# EAGLE board untitled (EAGLE 9.6.2)
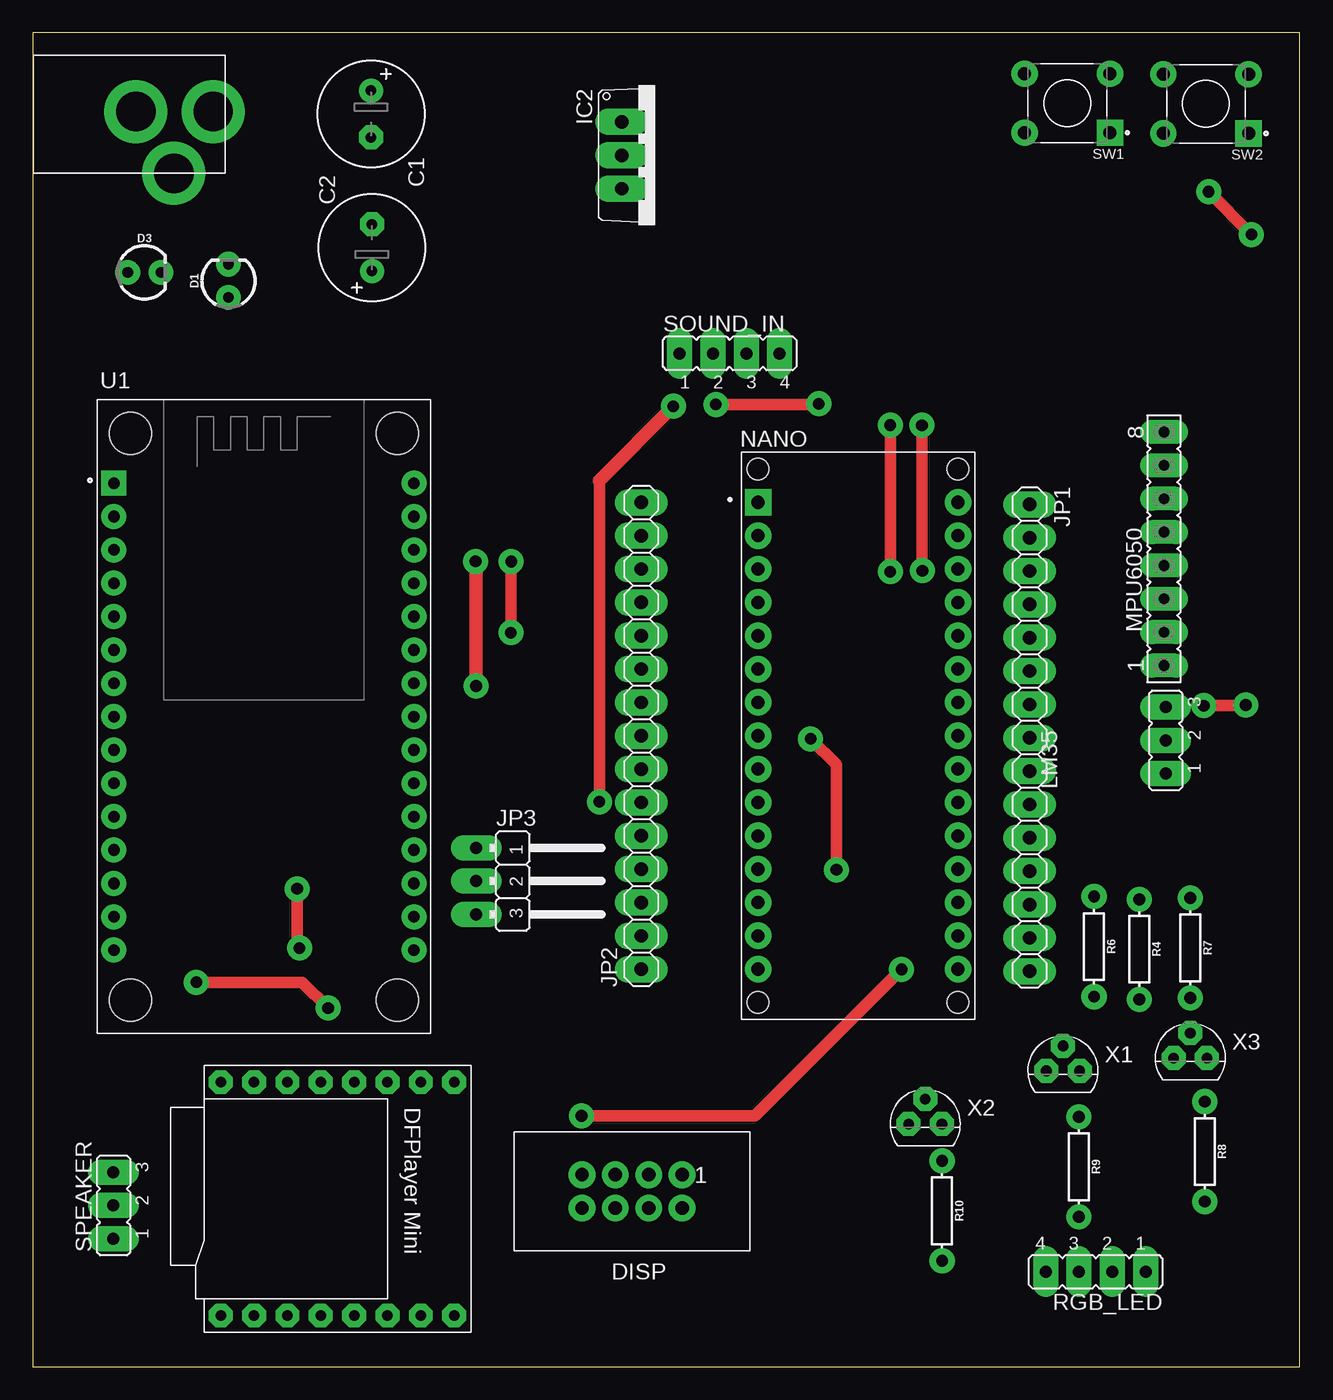
[diagram p0: board, top side]
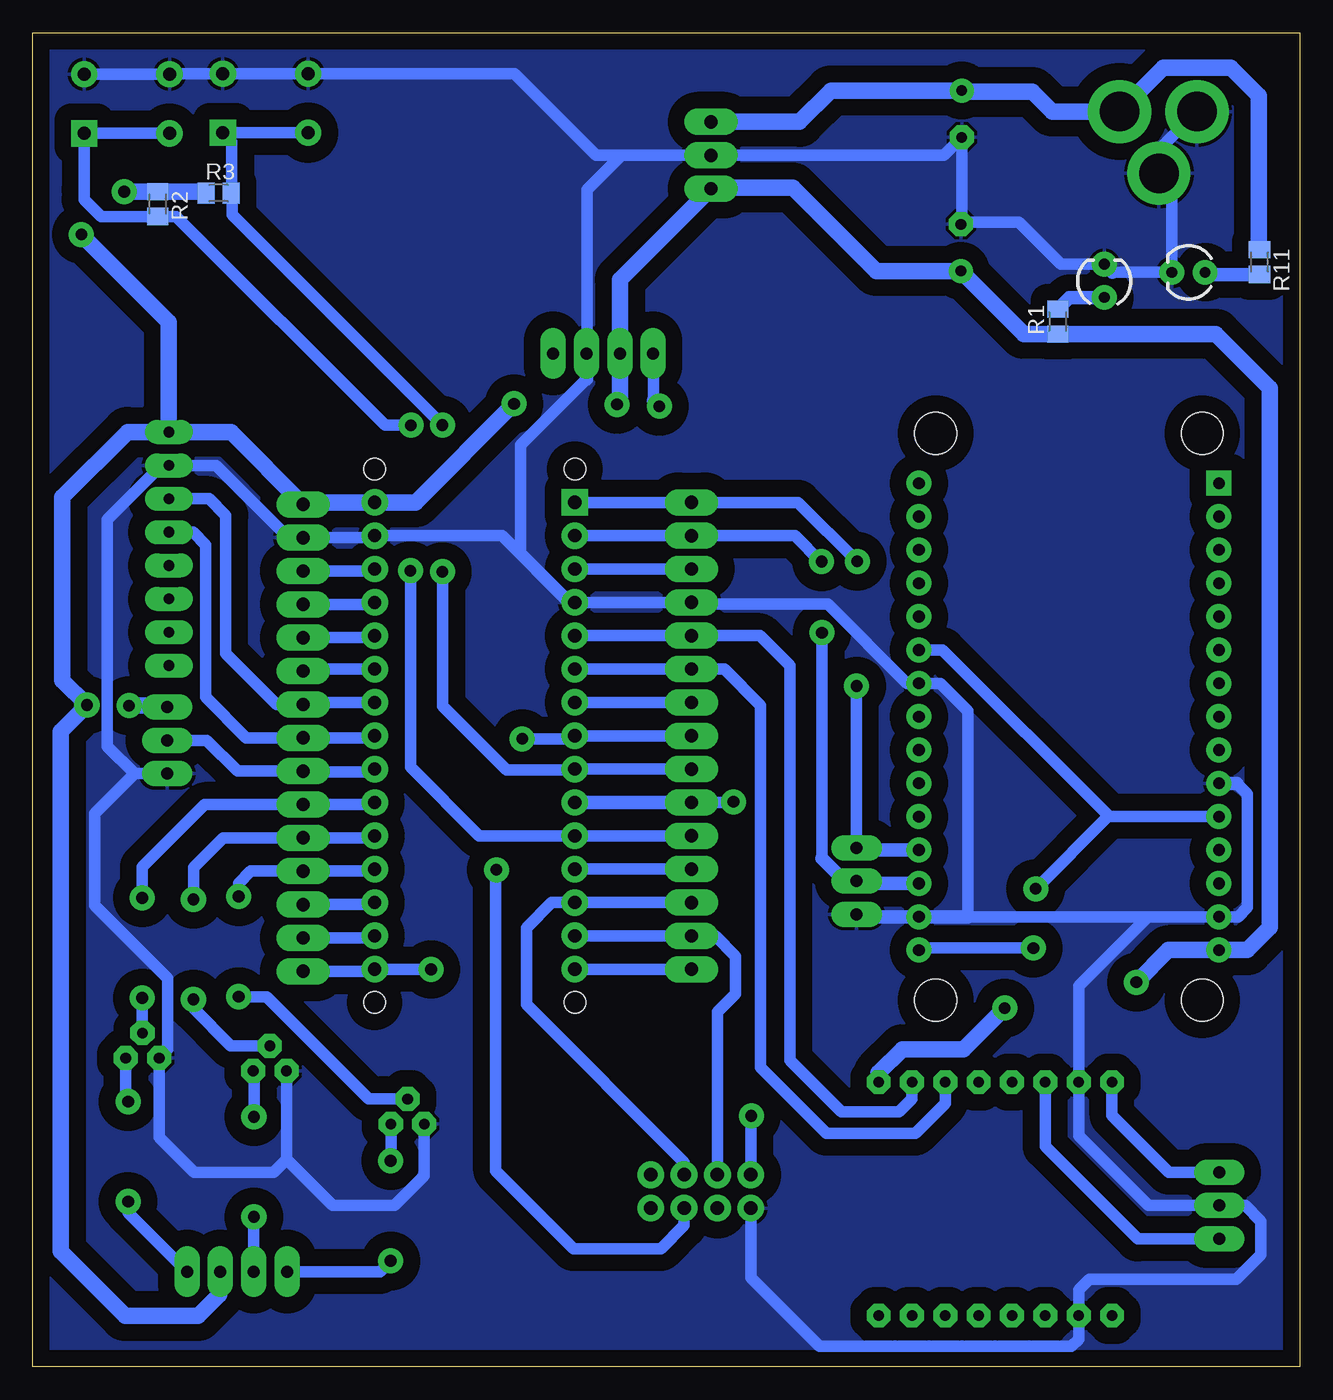
[diagram p1: board, bottom side, seen from below]

Size 96.52 x 101.6 mm. Coordinates in mm from the lower left corner, seen from the top.
Outline: 0,0 96.52,0 96.52,101.6 0,101.6 0,0
Copper layers (1*16): Top 0.035mm / dielectric 1.5mm / Bottom 0.035mm
Design rules "default *": minimum track width 6mil, minimum drill 0.35mm, track to track 6mil, track to pad 6mil, pad to pad 6mil, via to via 6mil, smd to smd 6mil, copper to edge 40mil, drill to drill 6mil, minimum pad ring 20mil, minimum via ring 20mil, stop-mask expansion 4mil, vias tented up to drill 0mil, thermal gap 10mil

## Footprints (pad centres in the part's own frame; a part is rotated, then mirrored left to right if it is on the bottom)
E3,5-8 = drill 0.813 pad 1.6: + -1.778,0 | drill 0.813 pad 1.6 octagon: - 1.778,0
LED_3MM = drill 0.813 pad 1.88: A -1.27,0; K 1.27,0
612008235121 = drill 1.02: 1 -3.81,-1.27; 2 -3.81,1.27; 3 -1.27,-1.27; 4 -1.27,1.27; 5 1.27,-1.27; 6 1.27,1.27; 7 3.81,-1.27; 8 3.81,1.27
TO220V = drill 1.016 long: 1 -2.54,-2.54; 2 0,-2.54; 3 2.54,-2.54
1X15 = drill 1.016 long: 1 -17.78,0; 2 -15.24,0; 3 -12.7,0; 4 -10.16,0; 5 -7.62,0; 6 -5.08,0; 7 -2.54,0; 8 0,0; 9 2.54,0; 10 5.08,0; 11 7.62,0; 12 10.16,0; 13 12.7,0; 14 15.24,0; 15 17.78,0
JP2W = drill 0.914 long: 1 -2.54,-1.27; 2 0,-1.27; 3 2.54,-1.27
JP2 = drill 0.914 long: 1 -2.54,0; 2 0,0; 3 2.54,0
FE08 = drill 0.813 long: 1 -8.89,0; 2 -6.35,0; 3 -3.81,0; 4 -1.27,0; 5 1.27,0; 6 3.81,0; 7 6.35,0; 8 8.89,0
MODULE_A000005 = drill 1 square: 1 -7.62,17.78 | drill 1: 2 -7.62,15.24; 3 -7.62,12.7; 4 -7.62,10.16; 5 -7.62,7.62; 6 -7.62,5.08; 7 -7.62,2.54; 8 -7.62,0; 9 -7.62,-2.54; 10 -7.62,-5.08; 11 -7.62,-7.62; 12 -7.62,-10.16; 13 -7.62,-12.7; 14 -7.62,-15.24; 15 -7.62,-17.78; 16 7.62,-17.78; 17 7.62,-15.24; 18 7.62,-12.7; 19 7.62,-10.16; 20 7.62,-7.62; 21 7.62,-5.08; 22 7.62,-2.54; 23 7.62,0; 24 7.62,2.54; 25 7.62,5.08; 26 7.62,7.62; 27 7.62,10.16; 28 7.62,12.7; 29 7.62,15.24; 30 7.62,17.78 | hole 1.651: -7.62,-20.32; 7.62,-20.32; -7.62,20.32; 7.62,20.32
M0805 = smd 1.3 x 1.6: 1 -0.95,0; 2 0.95,0
AXIAL-0.3 = drill 0.9 pad 1.88: P$1 -3.81,0; P$2 3.81,0
JP4 = drill 0.914 long: 1 -3.81,0; 2 -1.27,0; 3 1.27,0; 4 3.81,0
TE_1825910-2 = drill 0.99 square: 1 0,0 | drill 0.99: 2 6.5,0; 3 0,-4.5; 4 6.5,-4.5
MODULE_ZC563900 = drill 0.889 pad 1.753 square: 1 -11.43,17.78 | drill 0.889 pad 1.753: 2 -11.43,15.24; 3 -11.43,12.7; 4 -11.43,10.16; 5 -11.43,7.62; 6 -11.43,5.08; 7 -11.43,2.54; 8 -11.43,0; 9 -11.43,-2.54; 10 -11.43,-5.08; 11 -11.43,-7.62; 12 -11.43,-10.16; 13 -11.43,-12.7; 14 -11.43,-15.24; 15 -11.43,-17.78; 16 11.43,-17.78; 17 11.43,-15.24; 18 11.43,-12.7; 19 11.43,-10.16; 20 11.43,-7.62; 21 11.43,-5.08; 22 11.43,-2.54; 23 11.43,0; 24 11.43,2.54; 25 11.43,5.08; 26 11.43,7.62; 27 11.43,10.16; 28 11.43,12.7; 29 11.43,15.24; 30 11.43,17.78 | hole 3.2: -10.16,21.59; 10.16,21.59; 10.16,-21.59; -10.16,-21.59
DFPLAYER = drill 0.8 pad 1.676 octagon: ADKEY1 8.89,-1.27; ADKEY2 8.89,1.27; BUSY 8.89,8.89; DAC_L -8.89,-1.27; DAC_R -8.89,1.27; GND_1 -8.89,-6.35; GND_2 8.89,-6.35; IO1 8.89,-8.89; IO2 8.89,-3.81; RX -8.89,6.35; SPK1 -8.89,-3.81; SPK2 -8.89,-8.89; TX -8.89,3.81; USB+ 8.89,3.81; USB- 8.89,6.35; VCC -8.89,8.89
PJ-102A = drill 3 pad 4.8: RING 0.1,-3.39; RING_SW -4.6,-6.29; TIP 0.1,-9.29
TO92 = drill 0.813 octagon: 1 1.27,0; 2 0,1.905; 3 -1.27,0

## Placement (x,y rotation side)
C1  [E3,5-8]  25.76,95.42 270 top
C2  [E3,5-8]  25.83,85.23 90 top
D1  [LED_3MM]  14.91,82.71 90 top
D3  [LED_3MM]  8.49,83.36 0 top
DISP  [612008235121]  45.64,13.35 180 top
IC2  7805TV  [TO220V]  47.4,92.27 270 top
JP1  [1X15]  75.93,47.9 270 top
JP2  [1X15]  46.35,48.06 90 top
JP3  [JP2W]  35.05,36.99 270 top
LM35  [JP2]  86.29,47.71 90 top
MPU6050  [FE08]  86.16,62.3 90 top
NANO  A000005  [MODULE_A000005]  62.86,48.06 0 top
R1  1k  [M0805]  18.46,79.61 90 bottom
R2  1k  [M0805]  87,88.56 270 bottom
R3  1k  [M0805]  82.37,89.4 0 bottom
R4  330  [AXIAL-0.3]  84.28,31.79 270 top
R6  330  [AXIAL-0.3]  80.83,32 270 top
R7  330  [AXIAL-0.3]  88.18,31.9 270 top
R8  330  [AXIAL-0.3]  89.27,16.38 270 top
R9  330  [AXIAL-0.3]  79.68,15.22 270 top
R10  330  [AXIAL-0.3]  69.26,11.87 270 top
R11  1k  [M0805]  3.08,84.15 270 bottom
RGB_LED  [JP4]  80.97,7.24 180 top
SOUND_IN  [JP4]  53.07,77.18 0 top
SPEAKER  [JP2]  6.14,12.28 90 top
SW1  1825910-2  [TE_1825910-2]  82.05,93.99 180 top
SW2  1825910-2  [TE_1825910-2]  92.61,93.94 180 top
U1  ZC563900  [MODULE_ZC563900]  17.6,49.51 0 top
U$1  DFPLAYER  [DFPLAYER]  23.2,12.78 270 top
U$3  2.1MMJACKTHM  [PJ-102A]  4.45,95.5 90 top
X1  [TO92]  78.47,22.54 0 top
X2  [TO92]  67.98,18.48 0 top
X3  [TO92]  88.17,23.5 0 top

## Library data of the parts
C1 C2 JP1 JP2 R1-R3 R11 U$3 = adafruit
D1 D3 = SparkFun-LED; PROD_ID: DIO-08794
DISP = Wurth_Elektronik_Electromechanic_Wire_to_Board_Connectors_rev19a
IC2 = linear
JP3 LM35 RGB_LED SOUND_IN SPEAKER = jumper
MPU6050 = con-lsta; OC_FARNELL: unknown; OC_NEWARK: unknown
NANO = A000005; AVAILABILITY: Good; DESCRIPTION: ATmega328 Arduino Nano AVR® ATmega AVR MCU 8-Bit Embedded Evaluation Board; MF: Arduino; MP: A000005; PACKAGE: None; PRICE: None; PURCHASE-URL: https://pricing.snapeda.com/search/part/A000005/?ref=eda
R4 R6-R10 = SparkFun-Resistors; PROD_ID: RES-8371
SW1 SW2 = 1825910-2; AVAILABILITY: In Stock; COMMENT: 1825910-2; CONFIGURATION_POLE-THROW: Single Pole - Single Throw; CONTACT_CURRENT_RATING: 50 mA; DESCRIPTION: 50 mA SPST Round Actuator 160 Gram Force Tactile Pushbutton Switch; EU_ROHS_COMPLIANCE: Compliant; MF: TE Connectivity; MP: 1825910-2; PACKAGE: None; PRICE: None; PURCHASE-URL: https://pricing.snapeda.com/search/part/1825910-2/?ref=eda
U1 = nodemcuZC563900; AVAILABILITY: Unavailable; DESCRIPTION: NodeMcu Lua ESP8266 WIFI Internet of Things Network Development Module Board; MF: YKS; MP: ZC563900; PACKAGE: None; PRICE: None
U$1 = DFPlayer_v1
X1-X3 = sym

## Nets
3V3: U1.11 U1.16 U1.25
5V: C2.+ IC2.3 JP1.1 LM35.3 MPU6050.8 NANO.30 R1.1 R2.1 R3.1 RGB_LED.2 SOUND_IN.2 U1.15 U$1.VCC
5V0: JP1.4 NANO.27
9_IN: C1.+ IC2.1 R11.1 U$3.TIP
A0: JP1.12 NANO.19 R6.P$1
A1: JP1.11 NANO.20 R4.P$1
A2: JP1.10 NANO.21 R7.P$1
A6: JP1.6 NANO.25
A7: JP1.5 NANO.26
AD0: MPU6050.2
AREF: JP1.13 NANO.18
BACK: JP2.5 NANO.11 R2.2 SW2.1 SW2.2
BASE_BLUE: R6.P$2 X2.2
BASE_GREEN: R4.P$2 X1.2
BASE_RED: R7.P$2 X3.2
BLUE: R10.P$2 RGB_LED.4
COLLECTOR_BLUE: R10.P$1 X2.1
COLLECTOR_GREEN: R9.P$1 X1.1
COLLECTOR_RED: R8.P$1 X3.1
CS_DISP: DISP.3 JP2.3 NANO.13
D4: JP2.9 NANO.7
D9: JP2.4 NANO.12
GND: C1.- C2.- D1.K D3.K DISP.8 IC2.2 JP1.2 JP2.12 JP3.3 LM35.1 MPU6050.7 NANO.4 NANO.29 SOUND_IN.3 SPEAKER.2 SW1.3 SW1.4 SW2.3 SW2.4 U1.10 U1.14 U1.17 U1.24 U$1.GND_1 U$1.GND_2 U$3.RING U$3.RING_SW X1.3 X2.3 X3.3
GREEN: R9.P$2 RGB_LED.3
INT: MPU6050.1
MISO: JP2.1 NANO.15
MOSI: DISP.5 JP2.2 NANO.14
N$1: DISP.2
N$2: D3.A R11.2
N$3: D1.A R1.2
N$5: DISP.6
N$8: JP1.14 NANO.17
N$13: U$1.DAC_R
N$14: U$1.DAC_L
N$18: U$1.BUSY
N$19: U$1.USB-
N$20: U$1.USB+
N$21: U$1.ADKEY2
N$22: U$1.ADKEY1
N$23: U$1.IO2
N$25: U$1.IO1
OK: JP2.7 NANO.9 R3.2 SW1.1 SW1.2
RED: R8.P$2 RGB_LED.1
RESET_1: JP2.13 NANO.3
RESET_2: JP1.3 NANO.28
RST: DISP.4 JP2.8 NANO.8
RX_DF: JP2.11 NANO.5 U$1.RX
RXNANO: JP2.14 JP3.2 NANO.2 U1.18
SCK: DISP.7 JP1.15 NANO.16
SCL: JP1.7 MPU6050.6 NANO.24
SDA: JP1.8 MPU6050.5 NANO.23
SOUND_A0: SOUND_IN.4
SOUND_D0: JP2.6 NANO.10 SOUND_IN.1
SPK_1: SPEAKER.1 U$1.SPK1
SPK_2: SPEAKER.3 U$1.SPK2
TEMP: JP1.9 LM35.2 NANO.22
TX_DF: JP2.10 NANO.6 U$1.TX
TXNANO: JP2.15 JP3.1 NANO.1 U1.19
VCC: DISP.1
XCL: MPU6050.3
XDA: MPU6050.4

## Tracks (layer width: path | path; a pad name or v marks a point on that pad's centre or on a via)
3V3  (via drill 0.89)
  Top 0.889: v20.13,36.4 20.13,32.16 20.36,31.93 v20.31,31.88
  Bottom 0.889: U1.25 27.23,54.59 14.53,41.89 U1.11 14.63,41.89 v20.13,36.4 | v20.31,31.88 28.88,31.88 U1.16
5V  (via drill 0.89)
  Top 0.889: v52.02,73.29 59.82,73.29 v59.87,73.34 | v12.46,29.29 20.52,29.29 v22.49,27.32 | v89.19,50.35 92.28,50.35 92.38,50.25 92.39,50.27 v92.39,50.4 | v89.56,89.5 v92.82,86.23
  Bottom 0.889: 51.8,73.51 v52.02,73.29 | LM35.3 86.39,50.35 | RGB_LED.2 82.33,7.14 | R3.1 83.44,89.51 | 89.54,89.51 v89.56,89.5
  Bottom 1.016: 44.78,89.81 IC2.3
  Bottom 1.27: 44.78,89.81 38.64,89.81 32.28,83.45 C2.+ 21.04,78.66 R1.1 6.41,78.66 2.29,74.54 2.29,33.45 4,31.73 U1.15 10.01,31.73 v12.46,29.29 | IC2.3 51.8,82.79 SOUND_IN.2 51.8,73.51 | MPU6050.8 81.43,71.19 JP1.1 75.77,65.84 NANO.30 67.37,65.84 v59.87,73.34 | v22.49,27.32 25.63,24.18 30.28,24.18 32.09,22.36 U$1.VCC | 86.39,50.35 v89.19,50.35 | MPU6050.8 89.3,71.19 94.26,66.23 94.26,52.27 v92.39,50.4 94.4,48.4 94.4,8.78 89.5,3.87 83.93,3.87 82.33,5.47 82.33,7.14 | 83.44,89.51 R2.1 89.54,89.51 | v92.82,86.23 86.16,79.57 MPU6050.8
5V0
  Bottom 0.889: JP1.4 70.63,58.06
  Bottom 1.016: NANO.27 70.63,58.06
9_IN
  Bottom 1.016: R11.1 3.16,85.17 | C1.+ 25.67,97.11
  Bottom 1.27: 3.16,85.17 3.16,96.82 5.26,98.93 10.41,98.93 U$3.TIP 18.87,95.6 20.39,97.11 25.67,97.11 | C1.+ 35.73,97.2 38.12,94.81 IC2.1
A0
  Bottom 0.889: NANO.19 70.63,37.74 JP1.12 79.92,37.74 80.83,36.83 R6.P$1
A1
  Bottom 0.889: NANO.20 70.63,40.28 JP1.11 82.02,40.28 84.28,38.03 R4.P$1
A2
  Bottom 0.889: NANO.21 70.63,42.82 JP1.10 83.42,42.82 88.18,38.07 R7.P$1
A6
  Bottom 0.889: NANO.25 75.77,53.14 JP1.6
A7
  Bottom 0.889: JP1.5 70.63,55.52
  Bottom 1.016: NANO.26 70.63,55.52
AREF
  Bottom 0.889: JP1.13 70.63,35.2 NANO.18
BACK  (via drill 0.89)
  Top 0.889: v67.72,71.7 67.72,60.67 v67.75,60.63
  Bottom 0.889: JP2.5 NANO.11 62.52,40.44 67.75,45.67 v67.75,60.63 | v67.72,71.7 69.68,71.7 85.59,87.61 R2.2 91.32,87.61 92.61,88.9 92.61,89.66 SW2.1 SW2.2
BASE_BLUE
  Bottom 0.889: X2.2 70.94,20.38 78.7,28.15 80.8,28.15 R6.P$2
BASE_GREEN
  Bottom 0.889: X1.2 79.02,24.44 79.02,24.43 81.43,24.43 84.28,27.28 R4.P$2
BASE_RED
  Bottom 0.889: R7.P$2 X3.2
BLUE
  Bottom 0.889: R10.P$2 70.08,7.24 RGB_LED.4
COLLECTOR_BLUE
  Bottom 0.889: R10.P$1 69.25,15.69 X2.1
COLLECTOR_GREEN
  Bottom 0.889: X1.1 79.68,22.47 R9.P$1
COLLECTOR_RED
  Bottom 0.889: X3.1 89.44,20.36 R8.P$1
CS_DISP
  Bottom 0.889: JP2.3 NANO.13 57.01,35.36 58.93,33.44 58.93,27.6 46.91,15.58 DISP.3
D4
  Bottom 0.889: JP2.9 NANO.7
D9
  Bottom 0.889: JP2.4 NANO.12
GND
  Bottom 0.889: 51.66,92.27 IC2.2 27.13,92.27 C1.- 25.76,87.28 | 70.63,63.14 JP1.2 76.02,63.23 77.14,63.23 82.55,68.65 MPU6050.7 86.74,68.65 90.84,64.54 90.84,47.24 88.78,45.17 | U$3.RING 10.74,92.7 U$3.RING_SW 9.76,89.92 D3.K 14.29,83.36 | D1.K 18.22,83.98 21.42,87.18 25.66,87.18 | 54.29,77.23 54.29,89.64 51.66,92.27 | 4.82,44.43 4,43.61 4,34.98 4.71,34.27 U1.14 11.57,34.27 | 55.6,58.22 59.37,61.99 59.37,70.19 54.34,75.22 | 25.29,34.27 25.29,49.96 27.38,52.05 U1.24 29.93,52.05 35.95,58.08 46.21,58.08 JP2.12 NANO.4 55.7,58.22 60.77,63.3 NANO.29 | X2.3 66.71,14.55 68.95,12.31 73.7,12.31 77.2,15.81 | X1.3 77.2,15.81 | 77.2,15.81 78.19,14.82 84.24,14.82 86.9,17.48 X3.3 86.25,24.16 86.25,29.59 91.8,35.14 91.8,42.15 88.78,45.17 | LM35.1 88.78,45.17 | 11.57,34.27 16.85,28.99 U$1.GND_1 16.85,17.58 11.55,12.28 SPEAKER.2 4.16,12.28 2.97,11.09 2.97,8.53 4.84,6.67 16.06,6.67 16.85,5.88 U$1.GND_2 16.85,2.09 17.41,1.54 36.59,1.54 41.83,6.78 DISP.8 | 51.66,92.27 53.6,92.27 59.82,98.49 SW1.4 SW1.3 86.06,98.49 SW2.4 SW2.3 | 11.57,34.27 26.15,34.27
  Bottom 1.016: NANO.29 70.63,63.14 | 14.29,83.36 D1.K | C2.- 25.66,87.18 25.76,87.28 | 54.29,77.23 SOUND_IN.3 54.34,75.22 | 4.82,44.43 U1.10 | JP3.3 33.6,34.27 U1.17 26.15,34.27 25.29,34.27 | 55.6,58.22 NANO.4
  pour Bottom (isolate 1.27): 0.05,0.05 96.48,0.05 96.48,101.54 0.04,101.54 0.04,0.05
GREEN
  Bottom 0.889: R9.P$2 79.7,11.39 RGB_LED.3
MISO
  Bottom 0.889: JP2.1 NANO.15
MOSI
  Bottom 0.889: NANO.14 JP2.2 44.54,32.82 42.99,31.27 42.99,28.41 44.37,27.03 DISP.5
N$2
  Bottom 1.016: R11.2 7.06,83.2 D3.A
N$3
  Bottom 1.016: D1.A 17.58,81.44 R1.2
N$8
  Bottom 0.889: JP1.14 70.63,32.66 NANO.17
OK  (via drill 0.89)
  Top 0.889: v65.32,71.72 v65.32,60.55
  Bottom 0.889: JP2.7 NANO.9 55.3,45.45 60.43,45.45 65.32,50.34 v65.32,60.55 | v65.32,71.72 81.34,87.74 81.34,89.28 81.31,89.28 R3.2 81.36,89.46 81.36,93.3 SW1.1 SW1.2
RED
  Bottom 0.889: RGB_LED.1 89.27,11.73 R8.P$2
RESET_1
  Bottom 0.889: JP2.13 NANO.3
RESET_2
  Bottom 0.889: JP1.3 70.63,60.6
  Bottom 1.016: NANO.28 70.63,60.6
RST  (via drill 0.89)
  Top 0.889: v61.21,37.85 61.21,45.86 v59.24,47.83
  Bottom 0.889: JP2.8 NANO.8 55.47,47.83 v59.24,47.83 | DISP.4 46.91,10.76 48.68,8.99 55.33,8.99 61.27,14.92 61.27,37.8 v61.21,37.85
RX_DF
  Bottom 0.889: NANO.5 JP2.11 41.15,55.68 38.86,53.39 38.86,23.33 34.92,19.39 30.54,19.39 29.55,20.38 U$1.RX
RXNANO  (via drill 0.89)
  Top 0.889: v36.44,61.32 36.44,55.94
  Top 1.016: 36.44,55.94 v36.41,55.91
  Bottom 0.889: NANO.2 JP2.14 38.48,63.3 36.47,61.29 | v36.41,55.91 36.41,38.7
  Bottom 1.016: U1.18 33.78,36.81 JP3.2 33.92,36.85 34.56,36.85 36.41,38.7 | 36.47,61.29 v36.44,61.32
SCK  (via drill 0.89)
  Top 0.889: v41.8,19.1 55.02,19.1 v66.18,30.26
  Bottom 0.889: JP1.15 70.63,30.12 70.49,30.26 | NANO.16 70.49,30.26 | DISP.7 41.83,19.06 v41.8,19.1 | v66.18,30.26 70.49,30.26
SCL
  Bottom 0.889: MPU6050.6 83.09,66.11 81.81,64.83 81.81,54.3 77.95,50.44 JP1.7 75.77,50.6 NANO.24
SDA
  Bottom 0.889: 70.63,47.9 JP1.8 80.26,47.9 83.35,50.99 83.35,62.6 84.32,63.57 MPU6050.5
  Bottom 1.016: NANO.23 70.63,47.9
SOUND_D0  (via drill 0.89)
  Top 0.889: v43.16,43.03 43.16,67.51
  Top 1.016: 43.16,67.51 v48.79,73.15
  Bottom 0.889: JP2.6 43.21,42.98 | 49.24,77.15 49.24,73.6
  Bottom 1.016: JP2.6 NANO.10 | 43.21,42.98 v43.16,43.03 | v48.79,73.15 49.24,73.6 | 49.24,77.15 SOUND_IN.1
SPK_1
  Bottom 0.889: SPEAKER.1 12.35,9.73 19.39,16.78 U$1.SPK1
SPK_2
  Bottom 0.889: SPEAKER.3 10,14.81 14.31,19.13 U$1.SPK2
TEMP
  Bottom 0.889: 75.86,45.3 70.69,45.3 | JP1.9 80.91,45.36 83.26,47.71 LM35.2
  Bottom 1.016: 75.86,45.3 JP1.9 | NANO.22 70.69,45.3
TX_DF
  Bottom 0.889: NANO.6 JP2.10 43.85,53.14 41.08,50.37 41.08,22.78 36.08,17.78 29.3,17.78 27.01,20.07 U$1.TX
TXNANO  (via drill 0.89)
  Top 1.016: v33.77,51.84 33.77,61.3 33.73,61.34 v33.73,61.34
  Bottom 0.889: NANO.1 JP2.15 38.23,65.84 v33.73,61.34 | JP3.1 v33.78,51.83
  Bottom 1.016: U1.19 33.6,39.35 JP3.1 | v33.78,51.83 v33.77,51.84